# Altium PCB MolsonPCB.PcbDoc (part 4 of 9)
Units mil, origin at the board's own origin, x right, y up, seen from the top; angles counter-clockwise.
Board outline 8000 x 6000 mil, 14 copper layers (TopLayer (1 oz), InternalPlane1 (0.5 oz), InternalPlane2 (0.5 oz), MidLayer1 (0.5 oz), InternalPlane3 (0.5 oz), MidLayer2 (0.5 oz), InternalPlane4 (0.5 oz), InternalPlane5 (0.5 oz), MidLayer3 (0.5 oz), InternalPlane6 (0.5 oz), MidLayer4 (0.5 oz), InternalPlane7 (0.5 oz), InternalPlane8 (0.5 oz), BottomLayer (1 oz)), stack 86.2 mil thick; 657 components, 643 nets, 3094 pads, 1958 vias.
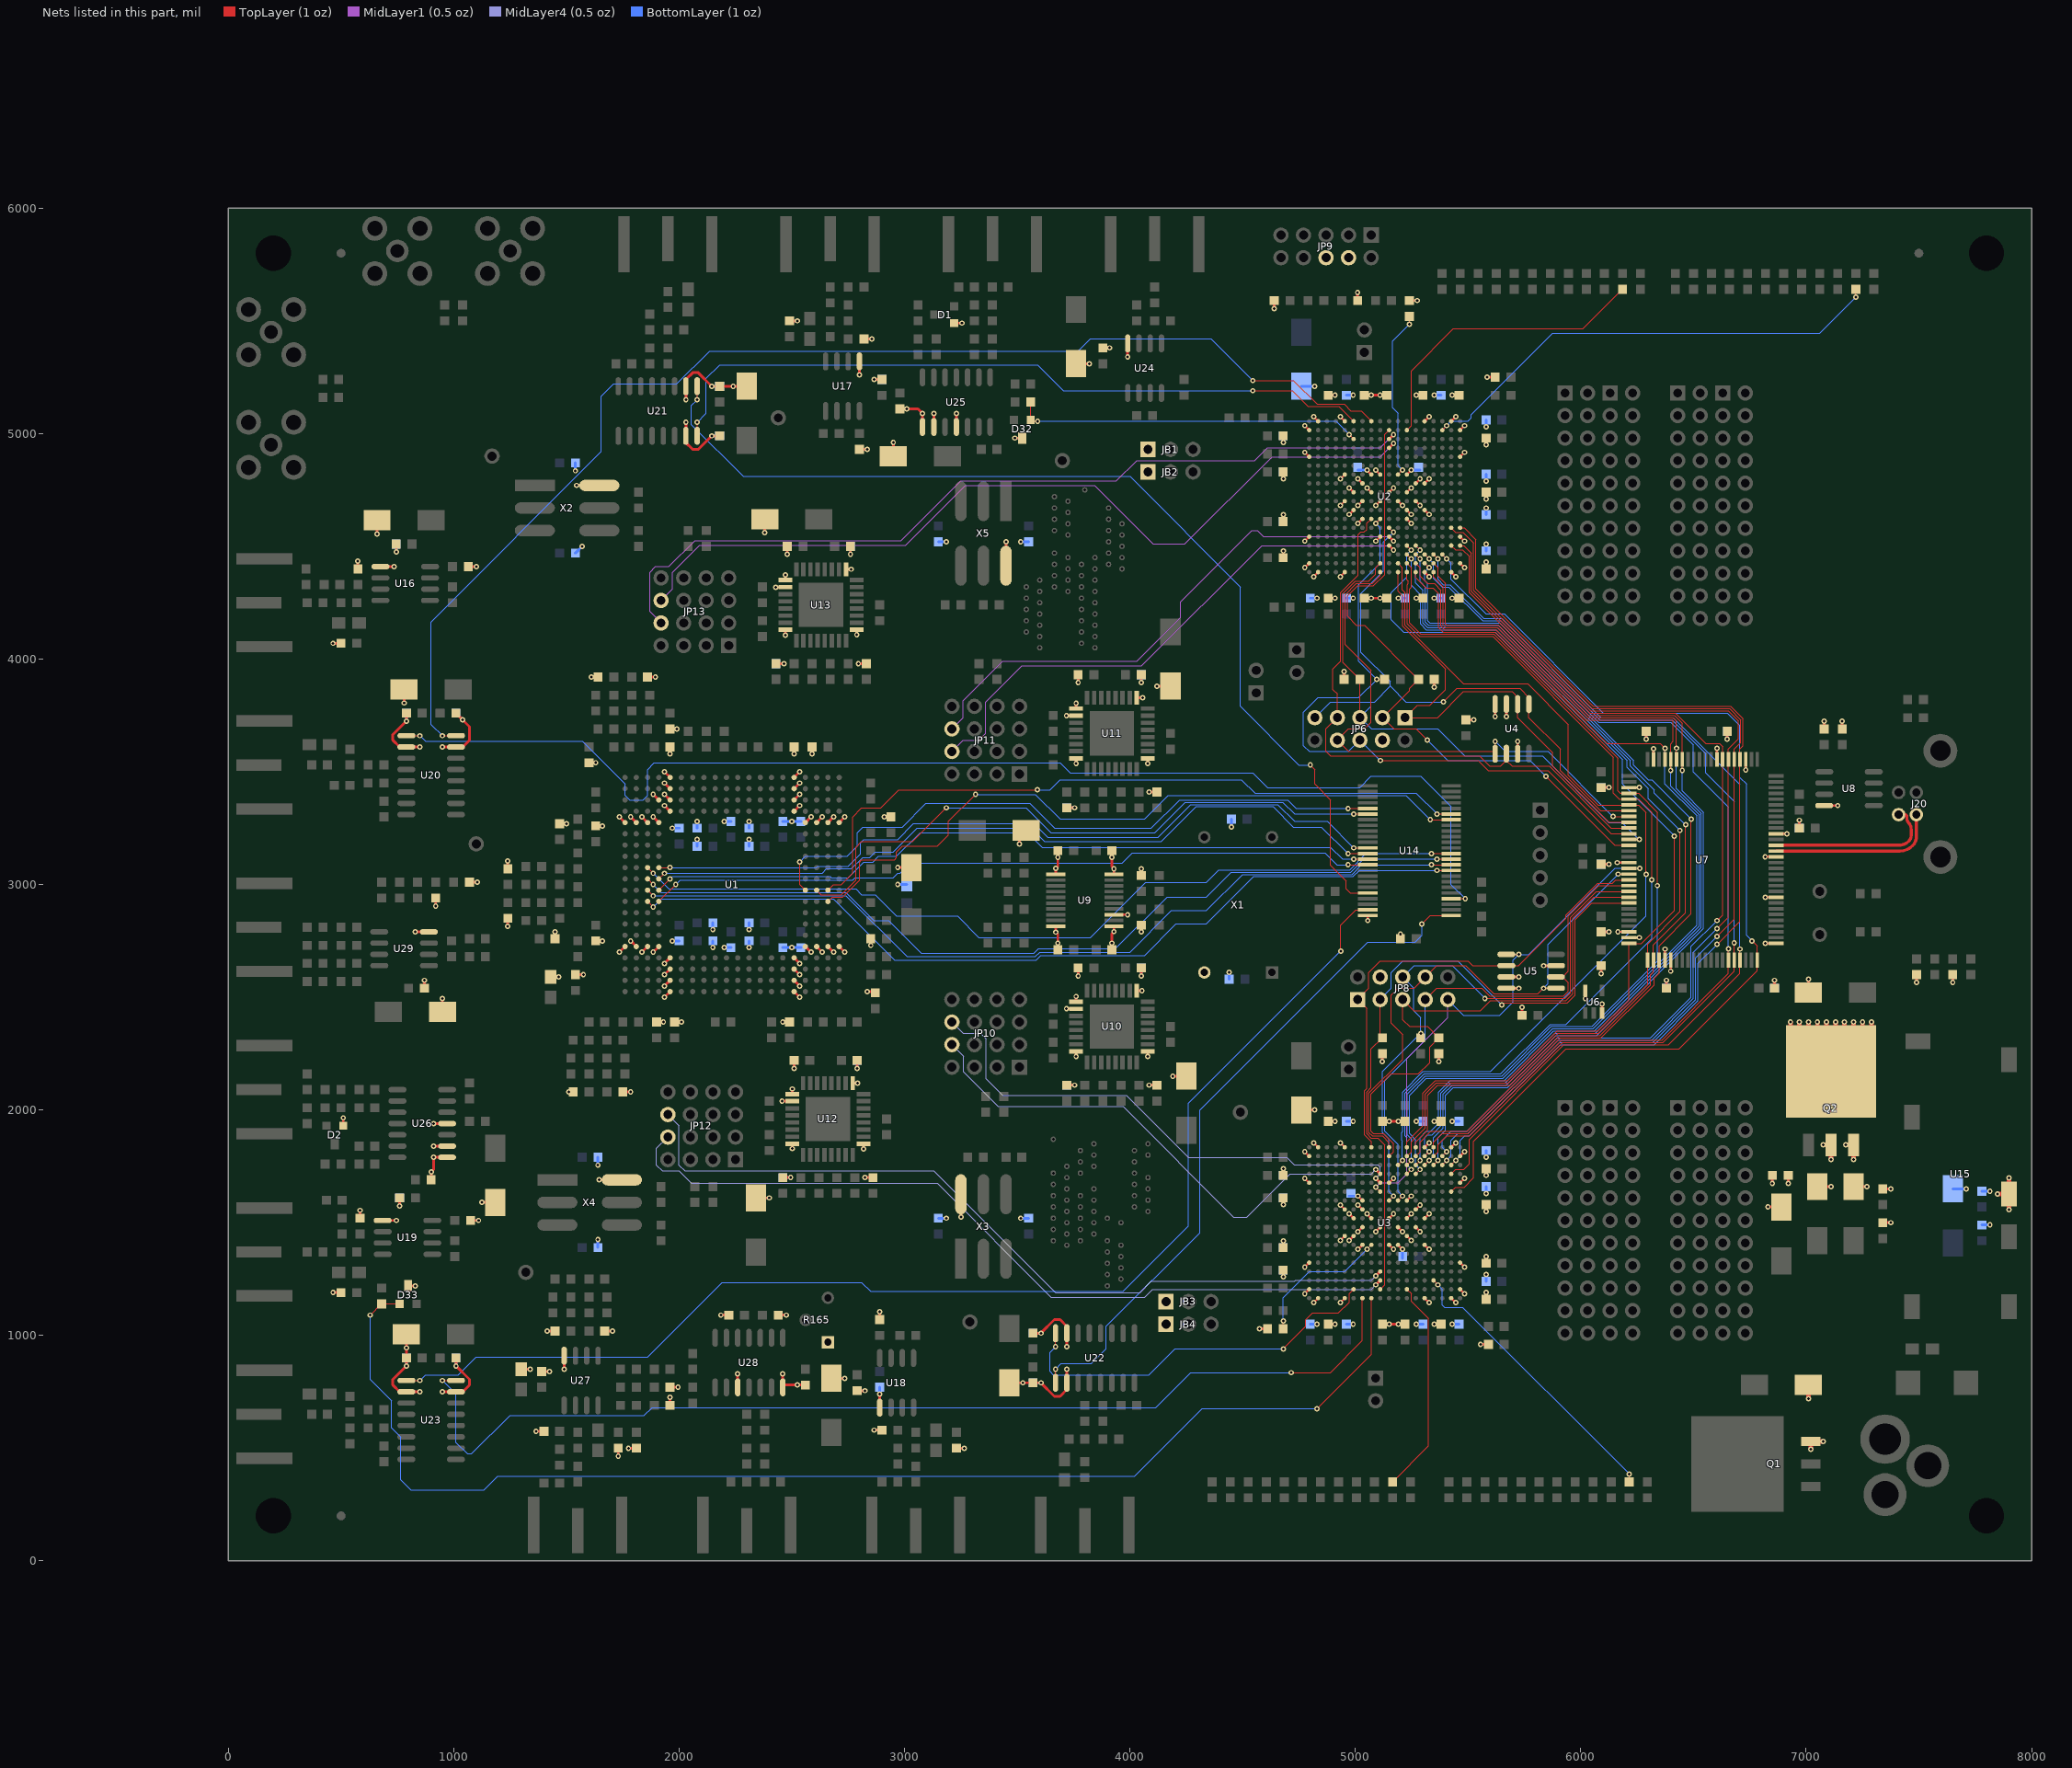
[diagram p16: the nets of this part, all layers, seen from the top]

## Via types
v1: diameter 24, hole 12, TopLayer (1 oz) to BottomLayer (1 oz), 1958 vias

## Nets (pads, with @x,y where several pads share a name; then routed paths per layer and width w, separated by ;. In a path a pad name is that pad's centre, name@x,y a point inside that pad or via, vN(x,y) a via of type N, cw(c..) or ccw(c..) an arc to the next point about the centre after c; other vN are vias at no path point)
+1.5V: C14.1 C15.1 C16.1 C17.1 C18.1 C19.1 C27.1 C28.1 C29.1 C30.1 C31.1 C32.1 C66.1 C178.1 C179.1 C180.1 C181.1 C182.1 C183.1 C192.1 C193.1 C194.1 C195.1 C196.1 C197.1 L10.1 Q2.2 Q2.4 U2.A2 U2.A17 U2.B1 U2.B18 U2.F8 U2.F10 U2.G9 U2.G11 U2.H10 U2.J9 U2.K10 U2.L9 U2.M8 U2.M10 U2.N9 U2.N11 U2.U1 U2.U18 U2.V2 U2.V17 U3.A2 U3.A17 U3.B1 U3.B18 U3.F8 U3.F10 U3.G9 U3.G11 U3.H10 U3.J9 U3.K10 U3.L9 U3.M8 U3.M10 U3.N9 U3.N11 U3.U1 U3.U18 U3.V2 U3.V17 | length 2278.6
  TopLayer (1 oz) w10: v1(4775.67,1185.04) U3.V17@4795.35,1204.73 ; v1(4775.67,1814.96) U3.V2@4795.35,1795.27 ; v1(4775.67,4405.04) U2.A2@4795.35,4424.73 ; v1(4775.67,5034.96) U2.A17@4795.35,5015.27 ; v1(4815.04,1145.67) U3.U18@4834.73,1165.35 ; v1(4815.04,1854.33) U3.U1@4834.73,1834.65 ; v1(4815.04,4365.67) U2.B1@4834.73,4385.35 ; v1(4815.04,5074.33) U2.B18@4834.73,5054.65 ; v1(4972.52,1421.26) U3.N11@4992.2,1440.94 ; v1(4972.52,1539.37) U3.N9@4992.2,1519.69 ; v1(4972.52,4641.26) U2.F8@4992.2,4660.94 ; v1(4972.52,4759.37) U2.F10@4992.2,4739.69 ; v1(5011.89,1460.63) U3.M10@5031.57,1480.31 ; v1(5011.89,1578.74) U3.M8@5031.57,1559.06 ; v1(5011.89,4680.63) U2.G9@5031.57,4700.31 ; v1(5011.89,4798.74) U2.G11@5031.57,4779.06 ; v1(5051.26,1539.37) U3.L9@5070.94,1519.69 ; v1(5051.26,4759.37) U2.H10@5070.94,4739.69 ; v1(5090.63,1460.63) U3.K10@5110.31,1480.31 ; v1(5090.63,4680.63) U2.J9@5110.31,4700.31 ; U3.J9@5149.69,1519.69 v1(5169.37,1539.37) ; U2.K10@5149.69,4739.69 v1(5169.37,4759.37) ; U3.H10@5189.06,1480.31 v1(5208.74,1460.63) ; U2.L9@5189.06,4700.31 v1(5208.74,4680.63) ; U3.G11@5228.43,1440.94 v1(5248.11,1421.26) ; U3.G9@5228.43,1519.69 v1(5248.11,1539.37) ; U2.M8@5228.43,4660.94 v1(5248.11,4641.26) ; U2.M10@5228.43,4739.69 v1(5248.11,4759.37) ; U3.F10@5267.8,1480.31 v1(5287.48,1460.63) ; U3.F8@5267.8,1559.06 v1(5287.48,1578.74) ; U2.N9@5267.8,4700.31 v1(5287.48,4680.63) ; U2.N11@5267.8,4779.06 v1(5287.48,4798.74) ; U3.B18@5425.27,1165.35 v1(5444.96,1145.67) ; U3.B1@5425.27,1834.65 v1(5444.96,1854.33) ; U2.U1@5425.27,4385.35 v1(5444.96,4365.67) ; U2.U18@5425.27,5054.65 v1(5444.96,5074.33) ; U3.A17@5464.65,1204.73 v1(5484.33,1185.04) ; U3.A2@5464.65,1795.27 v1(5484.33,1814.96) ; U2.V2@5464.65,4424.73 v1(5484.33,4405.04) ; U2.V17@5464.65,5015.27 v1(5484.33,5034.96)
  TopLayer (1 oz) w12: C195.1@4680,1390 v1(4680,1420) ; C193.1@4680,1710 v1(4680,1740) ; C14.1@4680,4450 v1(4680,4480) ; v1(4680,4800) C180.1@4680,4830 ; C197.1@4880,1050 v1(4910,1050) ; C30.1@4880,1950 v1(4910,1950) ; C182.1@4880,4270 v1(4910,4270) ; C178.1@4880,5170 v1(4910,5170) ; v1(5270,4270) C18.1@5300,4270 ; v1(5270,5170) C16.1@5300,5170 ; v1(5350,1050) C31.1@5380,1050 ; v1(5350,1950) C192.1@5380,1950 ; v1(5430,4270) C183.1@5460,4270 ; v1(5430,5170) C179.1@5460,5170 ; C196.1@5580,1160 v1(5580,1190) ; C32.1@5580,1320 v1(5580,1350) ; v1(5580,1550) C194.1@5580,1580 ; v1(5580,1710) C28.1@5580,1740 ; C19.1@5580,4400 v1(5580,4430) ; v1(5580,4710) C181.1@5580,4740 ; v1(5580,4950) C15.1@5580,4980 ; v1(6920,1675) L10.1@6920,1710 ; C66.1@7050,1660 v1(7110,1660)
  TopLayer (1 oz) w20: Q2.4@6930,2365 v1(6930,2390) ; Q2.4@6970,2365 v1(6970,2390) ; Q2.4@7010,2365 v1(7010,2390) ; Q2.4@7050,2365 v1(7050,2390) ; v1(7075,1845) Q2.2@7110,1845 v1(7110,1780) ; Q2.4@7090,2365 v1(7090,2390) ; Q2.4@7130,2365 v1(7130,2390) ; Q2.4@7170,2365 v1(7170,2390) ; Q2.4@7210,2365 v1(7210,2390) ; Q2.4@7250,2365 v1(7250,2390) ; Q2.4@7290,2365 v1(7290,2390)
  BottomLayer (1 oz) w12: C27.1@4680,1390 v1(4680,1420) ; C29.1@4680,1710 v1(4680,1740) ; v1(4680,4800) C17.1@4680,4830
+1.5VA: C146.1 C147.1 C148.1 C149.1 C150.1 C151.1 C152.1 C153.1 C154.1 L10.2 U2.J5 U2.J12 U3.J5 U3.J12 | length 606.4
  TopLayer (1 oz) w10: v1(5090.63,4523.15) U2.J5@5110.31,4542.84 ; v1(5090.63,4838.11) U2.J12@5110.31,4818.43 ; U3.J12@5149.69,1401.57 v1(5169.37,1381.89) ; U3.J5@5149.69,1677.16 v1(5169.37,1696.85)
  TopLayer (1 oz) w12: C149.1@5040,4270 C148.1@5140,4270 ; C147.1@5040,5170 C146.1@5140,5170 ; C150.1@5120,1050 C151.1@5220,1050 ; C152.1@5120,1950 C153.1@5220,1950 ; v1(6830,1570) C154.1@6890,1570 ; v1(6850,1675) L10.2@6850,1710
  other v1: 5150,1050 5190,1050 5150,1950 5190,1950 5070,4270 5110,4270 5070,5170 5110,5170
+3.3V: C1.1 C2.1 C3.1 C4.1 C5.1 C6.1 C7.1 C8.1 C9.1 C10.1 C11.1 C12.1 C13.1 C20.1 C21.1 C22.1 C23.1 C24.1 C25.1 C26.1 C33.1 C34.1 C35.1 C36.1 C37.1 C38.1 C39.1 C40.1 C45.1 C46.1 C47.1 C50.1 C51.1 C52.1 C55.1 C56.1 C57.1 C60.1 C61.1 C62.1 C65.1 C73.1 C85.1 C87.2 C101.1 C120.1 C126.1 C127.1 C128.1 C129.1 C130.1 C131.1 C132.1 C133.1 C138.1 C140.1 C141.1 C142.1 C143.1 C155.1 C156.1 C157.1 C159.1 C160.1 C161.1 C162.1 C163.1 C164.1 C165.1 C166.1 C167.1 C168.1 C169.1 C170.1 C171.1 C172.1 C173.1 C174.1 C175.1 C176.1 C177.1 C184.1 C185.1 C186.1 C187.1 C188.1 C189.1 C190.1 C191.1 C203.1 C204.1 C205.1 C206.1 C207.1 C208.1 C209.1 C210.1 C211.1 C212.1 C213.1 C214.1 C215.1 C216.1 C217.1 C218.1 C219.1 C220.1 C221.1 C222.1 C223.1 C224.1 C225.1 C226.1 C227.1 C228.1 C229.1 C230.1 C231.1 C232.1 C233.1 C234.1 C235.1 C236.1 C237.1 C238.1 C239.1 C240.1 C241.1 C242.1 C243.1 C244.1 C245.1 C246.1 C247.1 C248.1 C249.1 C250.1 C251.1 C252.1 C253.1 C254.1 C255.1 C256.1 C257.1 C258.1 C259.1 C260.1 C261.1 C262.1 C263.1 C264.1 C265.1 C266.1 C267.1 C268.1 C269.1 C270.1 C271.1 C272.1 C273.1 C274.1 C275.1 C276.1 C277.1 C278.1 C279.1 C280.1 C281.1 C282.1 C283.1 C284.1 C285.1 D32.3 D33.3 JB1.1 JB2.1 JB3.1 JB4.1 JP6.4 JP8.4 JP9.4 JP9.6 Q2.3 R3.2 R4.2 R5.2 R9.2 R10.2 R11.2 R13.2 R14.2 R16.2 R17.2 R18.2 R79.2 R80.2 R87.2 R88.2 R95.2 R96.2 R108.2 R109.2 R113.2 R114.2 R115.2 R116.2 R193.1 R196.1 R197.1 R198.2 R199.2 U1.A5 U1.A16 U1.B5 U1.B16 U1.C5 U1.C16 U1.D5 U1.D16 U1.D18 U1.E1 U1.E2 U1.E3 U1.E4 U1.E17 U1.E18 U1.E19 U1.E20 U1.T1 U1.T2 U1.T3 U1.T4 U1.T17 U1.T18 U1.T19 U1.T20 U1.U5 U1.U16 U1.V5 U1.V16 U1.W5 U1.W16 U1.Y5 U1.Y16 U2.A5 U2.A14 U2.E1 U2.E9 U2.E12 U2.E18 U2.G7 U2.H12 U2.M7 U2.M12 U2.P1 U2.P8 U2.P11 U2.P18 U2.V5 U2.V14 U3.A5 U3.A14 U3.E1 U3.E9 U3.E12 U3.E18 U3.G7 U3.H12 U3.M7 U3.M12 U3.P1 U3.P8 U3.P11 U3.P18 U3.V5 U3.V14 U4.3 U4.7 U4.8 U5.3 U5.7 U5.8 U6.3 U6.5 U7.1 U7.9 U7.16 U7.20 U7.33 U7.38 U7.49 U7.53 U7.66 U7.78 U7.79 U7.84 U7.85 U8.8 U9.1 U9.3 U9.10 U9.11 U9.20 U10.1 U10.9 U10.17 U10.18 U10.24 U11.1 U11.9 U11.17 U11.18 U11.24 U12.1 U12.9 U12.17 U12.18 U12.24 U13.1 U13.9 U13.17 U13.18 U13.24 U14.48 U15.P2 U16.5 U17.5 U18.5 U19.5 U20.2 U20.15 U21.2 U21.15 U22.2 U22.15 U23.2 U23.15 U24.8 X1.14 X2.6 X3.6 X4.6 X5.6 | length 14243.6
  TopLayer (1 oz) w10: v1(3928.94,2791.06) U9.1@3928.94,2814.84 ; U9.3@3928.94,2866.02 v1(3990,2866.02) ; U9.10@3928.94,3045.16 v1(3928.94,3070) ; v1(4775.67,1303.15) U3.V14@4795.35,1322.84 ; v1(4775.67,1696.85) U3.V5@4795.35,1677.16 ; v1(4775.67,4523.15) U2.A5@4795.35,4542.84 ; v1(4775.67,4916.85) U2.A14@4795.35,4897.16 ; v1(4933.15,1145.67) U3.P18@4952.84,1165.35 ; v1(4933.15,1421.26) U3.P11@4952.84,1440.94 ; v1(4933.15,1578.74) U3.P8@4952.84,1559.06 ; v1(4933.15,1854.33) U3.P1@4952.84,1834.65 ; v1(4933.15,4365.67) U2.E1@4952.84,4385.35 ; v1(4933.15,4680.63) U2.E9@4952.84,4700.31 ; v1(4933.15,4798.74) U2.E12@4952.84,4818.43 ; v1(4933.15,5074.33) U2.E18@4952.84,5054.65 ; v1(5011.89,1381.89) U3.M12@5031.57,1401.57 ; v1(5011.89,1618.11) U3.M7@5031.57,1598.43 ; v1(5011.89,4601.89) U2.G7@5031.57,4621.57 ; v1(5051.26,4838.11) U2.H12@5070.94,4818.43 ; v1(5054.96,2840.04) U14.48@5054.96,2862.5 ; U3.H12@5189.06,1401.57 v1(5208.74,1381.89) ; U3.G7@5228.43,1598.43 v1(5248.11,1618.11) ; U2.M7@5228.43,4621.57 v1(5248.11,4601.89) ; U2.M12@5228.43,4818.43 v1(5248.11,4838.11) ; U3.E18@5307.16,1165.35 v1(5326.85,1145.67) ; U3.E12@5307.16,1401.57 v1(5326.85,1381.89) ; U3.E9@5307.16,1519.69 v1(5326.85,1539.37) ; U3.E1@5307.16,1834.65 v1(5326.85,1854.33) ; U2.P1@5307.16,4385.35 v1(5326.85,4365.67) ; U2.P8@5307.16,4660.94 v1(5326.85,4641.26) ; U2.P11@5307.16,4779.06 v1(5326.85,4798.74) ; U2.P18@5307.16,5054.65 v1(5326.85,5074.33) ; U3.A14@5464.65,1322.84 v1(5484.33,1303.15) ; U3.A5@5464.65,1677.16 v1(5484.33,1696.85) ; U2.V5@5464.65,4542.84 v1(5484.33,4523.15) ; U2.V14@5464.65,4897.16 v1(5484.33,4916.85) ; v1(6162.2,3097.2) U7.66@6213.03,3097.2 ; v1(6164.88,2790.12) U7.78@6213.03,2790.12 ; U7.79@6213.03,2764.53 v1(6259.53,2764.53) ; U7.53@6213.03,3429.88 v1(6259.88,3429.88) ; U7.49@6322.48,3555.08 v1(6322.48,3602.52) ; U7.84@6373.66,2664.92 v1(6373.66,2713.66) ; v1(6399.25,2615.75) U7.85@6399.25,2664.92 ; U7.38@6603.98,3555.08 v1(6603.98,3603.98) ; v1(6731.93,3508.07) U7.33@6731.93,3555.08 ; v1(6817.8,3122.8) U7.16@6866.97,3122.8 ; v1(6818.66,2943.66) U7.9@6866.97,2943.66 ; v1(6818.94,2738.94) U7.1@6866.97,2738.94 ; U7.20@6866.97,3225.16 v1(6914.84,3225.16)
  TopLayer (1 oz) w12: v1(465,1190) R108.2@500,1190 ; v1(465,4070) R79.2@500,4070 ; R80.2@575,4400 v1(575,4435) ; R109.2@585,1520 v1(585,1555) ; v1(660,4555) C203.1@660,4615 ; U16.5@675,4410 v1(735,4410) ; U19.5@685,1510 v1(745,1510) ; v1(745,4475) C73.1@745,4510 ; U23.2@760,750 730,780 730,805 v1(790,865) C210.1@790,1005 ; v1(760,1575) C120.1@760,1610 ; U20.2@760,3610 730,3640 730,3665 v1(790,3725) C127.1@790,3760 ; v1(780,3805) C207.1@780,3865 ; U23.2@790,750 v1(850,750) ; U20.2@790,3610 v1(850,3610) ; D33.3@798,1220 v1(830,1220) ; v1(950,750) U23.15@1010,750 ; v1(950,3610) U20.15@1010,3610 ; C133.1@1010,900 v1(1010,865) 1070,805 1070,780 U23.15@1040,750 ; C126.1@1010,3760 1070,3700 1070,3640 U20.15@1040,3610 ; R113.2@1065,4410 v1(1100,4410) ; R116.2@1075,1510 v1(1110,1510) ; v1(1125,1590) C206.1@1185,1590 ; C227.1@1430,2590 v1(1465,2590) ; C215.1@1450,2760 v1(1450,2790) ; C214.1@1470,3270 v1(1500,3270) ; C216.1@1540,2600 v1(1575,2600) ; v1(1545,4770) X2.6@1646,4770 ; C211.1@1600,3540 v1(1630,3540) ; C7.1@1630,2750 v1(1660,2750) ; C8.1@1630,3260 v1(1660,3260) ; v1(1645,1690) X4.6@1746,1690 ; v1(1735,2700) U1.A5@1760,2725 ; v1(1735,3300) U1.A16@1760,3275 ; v1(1785,2750) U1.B5@1810,2725 ; v1(1785,3300) U1.B16@1810,3275 ; v1(1835,2700) U1.C5@1860,2725 ; v1(1835,3300) U1.C16@1860,3275 ; v1(1885,2700) U1.D5@1910,2725 ; v1(1885,3300) U1.D16@1910,3275 ; v1(1885,3400) U1.D18@1910,3375 ; C217.1@1900,2390 v1(1930,2390) ; v1(1935,2500) U1.E1@1960,2525 ; v1(1935,2550) U1.E2@1960,2575 ; v1(1935,2600) U1.E3@1960,2625 ; v1(1935,2650) U1.E4@1960,2675 ; v1(1935,3350) U1.E17@1960,3325 ; v1(1935,3400) U1.E18@1960,3375 ; v1(1935,3450) U1.E19@1960,3425 ; v1(1935,3500) U1.E20@1960,3475 ; v1(1960,3580) C1.1@1960,3610 ; C212.1@1960,3690 v1(1990,3690) ; C5.1@1980,2390 v1(2010,2390) ; U21.15@2030,4960 2060,4930 2085,4930 v1(2145,4990) C128.1@2180,4990 ; U21.15@2030,4990 v1(2030,5050) ; v1(2030,5150) U21.2@2030,5210 ; U21.2@2030,5240 2060,5270 2085,5270 v1(2145,5210) C208.1@2300,5210 ; C243.1@2340,1610 v1(2400,1610) ; v1(2380,4560) C244.1@2380,4620 ; v1(2428.74,4318.74) U13.18@2471.54,4318.74 ; C61.1@2430,3980 v1(2465,3980) ; v1(2456.26,2038.74) U12.18@2501.54,2038.74 ; C55.1@2460,1700 v1(2495,1700) ; v1(2460,2390) C6.1@2490,2390 ; v1(2471.54,4106.54) U13.24@2471.54,4129.76 ; U13.17@2471.54,4350.24 v1(2471.54,4373.46) ; v1(2480,4465) C239.1@2480,4500 ; R87.2@2490,5500 v1(2525,5500) ; v1(2501.54,1828.46) U12.24@2501.54,1849.76 ; U12.17@2501.54,2070.24 v1(2501.54,2093.46) ; v1(2510,2185) C236.1@2510,2220 ; U1.T1@2510,2525 v1(2535,2500) ; U1.T2@2510,2575 v1(2535,2550) ; U1.T3@2510,2625 v1(2535,2600) ; U1.T4@2510,2675 v1(2535,2650) ; U1.T17@2510,3325 v1(2535,3350) ; U1.T18@2510,3375 v1(2535,3400) ; U1.T19@2510,3425 v1(2535,3450) ; U1.T20@2510,3475 v1(2535,3500) ; v1(2510,3580) C2.1@2510,3610 ; U1.U5@2560,2725 v1(2585,2700) ; U1.U16@2560,3275 v1(2585,3300) ; v1(2590,3580) C213.1@2590,3610 ; U1.V5@2610,2725 v1(2635,2700) ; U1.V16@2610,3275 v1(2635,3300) ; U1.W5@2660,2725 v1(2685,2700) ; U1.W16@2660,3275 v1(2685,3300) ; C205.1@2675,810 v1(2735,810) ; U1.Y5@2710,2725 v1(2735,2700) ; U1.Y16@2710,3275 v1(2735,3300) ; U13.9@2740.24,4398.46 v1(2763.46,4398.46) ; v1(2760,4465) C62.1@2760,4500 ; U12.9@2770.24,2118.46 v1(2791.54,2118.46) ; v1(2788.46,4108.46) U13.1@2788.46,4129.76 ; C101.1@2790,755 v1(2825,755) ; v1(2790,2185) C57.1@2790,2220 ; v1(2795,3980) C60.1@2830,3980 ; R114.2@2800,4930 v1(2835,4930) ; v1(2800,5260) U17.5@2800,5320 ; v1(2818.46,1826.54) U12.1@2818.46,1849.76 ; R88.2@2820,5420 v1(2855,5420) ; v1(2825,1700) C56.1@2860,1700 ; v1(2835,2525) C218.1@2870,2525 ; v1(2850,2730) C4.1@2850,2760 ; v1(2865,580) R96.2@2900,580 ; v1(2865,5240) C85.1@2900,5240 ; U18.5@2890,680 v1(2890,740) ; R115.2@2890,1070 v1(2890,1105) ; v1(2910,3300) C3.1@2940,3300 ; C204.1@2950,4900 v1(2950,4960) ; v1(2970,3075) C167.1@3030,3075 ; R95.2@3230,500 v1(3265,500) ; v1(3250,1525) X3.6@3250,1626 ; X5.6@3450,4414 v1(3450,4520) ; C209.1@3465,790 v1(3605,790) 3665,730 3690,730 U22.2@3720,760 ; v1(3490,4980) D32.3@3522,4980 ; v1(3510,3180) C245.1@3510,3240 ; C131.1@3570,1010 v1(3605,1010) 3665,1070 3690,1070 U22.15@3720,1040 ; U9.20@3671.06,2814.84 v1(3671.06,2788.94) 3680,2780 C141.1@3680,2710 ; U9.11@3671.06,3045.16 v1(3671.06,3071.06) 3680,3080 C140.1@3680,3150 ; v1(3718.74,2448.74) U10.18@3761.54,2448.74 ; v1(3718.74,3748.74) U11.18@3761.54,3748.74 ; U22.2@3720,790 v1(3720,850) ; v1(3720,950) U22.15@3720,1010 ; C46.1@3720,2110 v1(3755,2110) ; C51.1@3720,3340 v1(3755,3340) ; C138.1@3760,5310 v1(3820,5310) ; v1(3761.54,2236.54) U10.24@3761.54,2259.76 ; U10.17@3761.54,2480.24 v1(3761.54,2503.46) ; v1(3761.54,3536.54) U11.24@3761.54,3559.76 ; U11.17@3761.54,3780.24 v1(3761.54,3803.46) ; v1(3770,2595) C230.1@3770,2630 ; v1(3770,3895) C233.1@3770,3930 ; C87.2@3880,5380 v1(3910,5380) ; C247.1@3920,2710 3920,2782.13 v1(3928.94,2791.06) ; C246.1@3920,3150 3920,3078.94 v1(3928.94,3070) ; v1(3990,5340) U24.8@3990,5400 ; U10.9@4030.24,2528.46 v1(4053.46,2528.46) ; U11.9@4030.24,3828.46 v1(4056.54,3828.46) ; v1(4050,2595) C45.1@4050,2630 ; v1(4050,2790) R198.2@4050,2820 ; R199.2@4050,3040 v1(4050,3070) ; v1(4050,3895) C50.1@4050,3930 ; v1(4078.46,2236.54) U10.1@4078.46,2259.76 ; v1(4078.46,3536.54) U11.1@4078.46,3559.76 ; v1(4085,2110) C47.1@4120,2110 ; v1(4085,3410) C52.1@4120,3410 ; v1(4120,3880) C242.1@4180,3880 ; v1(4190,2150) C241.1@4250,2150 ; v1(4575,1030) R10.2@4610,1030 ; v1(4640,5555) R14.2@4640,5590 ; v1(4680,1260) C33.1@4680,1290 ; v1(4680,1580) C34.1@4680,1610 ; C20.1@4680,4610 v1(4680,4640) ; v1(4680,4960) C21.1@4680,4990 ; C251.1@4760,2000 v1(4820,2000) ; R5.2@4950,3910 v1(4950,3945) ; R13.2@5010,5590 v1(5010,5625) ; v1(5120,2215) R9.2@5120,2250 ; R4.2@5240,5590 v1(5275,5590) ; v1(5350,3875) R3.2@5350,3910 ; v1(5370,2215) R11.2@5370,2250 ; C9.1@5490,3730 v1(5525,3730) ; v1(5555,960) R197.1@5590,960 ; v1(5585,5250) R196.1@5620,5250 ; v1(5620,3745) U4.8@5620,3800 ; U5.8@5670,2540 v1(5725,2540) ; U5.7@5670,2590 v1(5725,2590) ; v1(5670,3745) U4.7@5670,3800 ; U4.3@5720,3580 v1(5720,3635) ; C22.1@5740,2420 v1(5740,2455) ; v1(5835,2640) U5.3@5890,2640 ; v1(6020,2495) U6.5@6020,2530 ; v1(6090,2605) R16.2@6090,2640 ; C168.1@6090,2790 v1(6125,2790) ; C40.1@6090,3090 v1(6125,3090) ; C36.1@6090,3430 v1(6125,3430) ; U6.3@6095,2430 v1(6095,2470) ; v1(6290,3645) C169.1@6290,3680 ; C35.1@6380,2540 v1(6380,2575) ; v1(6650,3645) C37.1@6650,3680 ; C38.1@6860,2540 v1(6860,2575) ; C39.1@6970,3250 v1(6970,3285) ; C260.1@7010,2520 v1(7010,2580) ; U8.8@7080,3350 v1(7140,3350) ; R18.2@7080,3690 v1(7080,3725) ; R17.2@7160,3690 v1(7160,3725) ; C262.1@7210,1660 v1(7270,1660) ; C65.1@7340,1500 v1(7375,1500) ; C261.1@7340,1650 v1(7375,1650) ; v1(7650,2565) R193.1@7650,2600 v1(7650,2565)
  TopLayer (1 oz) w20: v1(7175,1845) Q2.3@7210,1845 v1(7210,1780) ; v1(7849.41,1627.83) U15.P2@7899.72,1627.83 ; v1(7899.72,1558.31) v1(7899.72,1698.15)
  BottomLayer (1 oz) w12: v1(745,4475) C266.1@745,4510 ; v1(760,1575) C269.1@760,1610 ; v1(790,865) C276.1@790,900 ; v1(790,3725) C271.1@790,3760 ; v1(1010,865) C277.1@1010,900 ; C270.1@1010,3760 v1(1040,3730) ; C282.1@1540,4470 v1(1570,4500) ; v1(1540,4835) C278.1@1540,4870 ; C285.1@1640,1390 v1(1640,1425) ; v1(1640,1755) C281.1@1640,1790 ; v1(1970,2750) C163.1@2000,2750 ; v1(1970,3250) C159.1@2000,3250 ; C222.1@2080,3170 v1(2080,3200) ; C160.1@2080,3250 v1(2080,3280) ; v1(2145,4990) C272.1@2180,4990 ; v1(2145,5210) C273.1@2180,5210 ; v1(2150,2720) C164.1@2150,2750 ; v1(2150,2800) C226.1@2150,2830 ; v1(2200,2720) C225.1@2230,2720 ; v1(2200,3280) C221.1@2230,3280 ; v1(2310,2720) C165.1@2310,2750 ; v1(2310,2800) C224.1@2310,2830 ; C220.1@2310,3170 v1(2310,3200) ; C161.1@2310,3250 v1(2310,3280) ; C240.1@2430,3980 v1(2465,3980) ; C237.1@2460,1700 v1(2495,1700) ; C166.1@2460,2720 C223.1@2540,2720 ; C162.1@2460,3280 C219.1@2540,3280 ; v1(2760,4465) C238.1@2760,4500 ; v1(2790,2185) C235.1@2790,2220 ; v1(2865,5240) C267.1@2900,5240 ; v1(2890,740) C268.1@2890,770 ; v1(2970,3000) C228.1@3010,3000 ; C283.1@3150,1520 v1(3185,1520) ; C280.1@3150,4520 v1(3185,4520) ; v1(3515,1520) C279.1@3550,1520 ; v1(3515,4520) C284.1@3550,4520 ; C274.1@3570,790 v1(3605,790) ; C275.1@3570,1010 v1(3605,1010) ; C231.1@3720,2110 v1(3755,2110) ; C234.1@3720,3340 v1(3755,3340) ; v1(4050,2595) C229.1@4050,2630 ; v1(4050,3895) C232.1@4050,3930 ; C249.1@4440,2580 v1(4440,2610) ; v1(4450,3255) C248.1@4450,3290 ; v1(4680,1260) C188.1@4680,1290 ; v1(4680,1580) C186.1@4680,1610 ; C174.1@4680,4610 v1(4680,4640) ; v1(4680,4960) C172.1@4680,4990 ; C250.1@4760,5210 v1(4820,5210) ; C190.1@4800,1050 v1(4830,1050) ; C155.1@4800,4270 v1(4830,4270) ; C157.1@4960,1050 v1(4990,1050) ; C184.1@4960,1950 v1(4990,1950) ; C176.1@4960,4270 v1(4990,4270) ; C170.1@4960,5170 v1(4990,5170) ; C23.1@4972.52,1618.11 v1(5011.89,1618.11) ; C10.1@5011.89,4838.11 v1(5051.26,4838.11) ; v1(5190,4270) C143.1@5220,4270 ; C26.1@5208.74,1342.52 v1(5208.74,1381.89) ; v1(5248.11,4838.11) C11.1@5287.48,4838.11 ; v1(5270,1050) C156.1@5300,1050 ; v1(5270,1950) C24.1@5300,1950 ; v1(5350,4270) C177.1@5380,4270 ; v1(5350,5170) C171.1@5380,5170 ; v1(5430,1050) C191.1@5460,1050 ; v1(5430,1950) C185.1@5460,1950 ; C189.1@5580,1240 v1(5580,1270) ; v1(5580,1630) C25.1@5580,1660 ; v1(5580,1790) C187.1@5580,1820 ; C13.1@5580,4480 v1(5580,4510) ; C175.1@5580,4640 v1(5580,4670) ; v1(5580,4790) C12.1@5580,4820 ; v1(5580,5030) C173.1@5580,5060 ; C257.1@6090,2790 v1(6125,2790) ; C256.1@6090,3090 v1(6125,3090) ; C254.1@6090,3430 v1(6125,3430) ; v1(6290,3645) C253.1@6290,3680 ; C259.1@6380,2540 v1(6380,2575) ; v1(6650,3645) C252.1@6650,3680 ; C258.1@6860,2540 v1(6860,2575) ; C255.1@6970,3250 v1(6970,3285) ; C265.1@7650,1650 v1(7710,1650) ; C263.1@7780,1490 v1(7815,1490) ; C264.1@7780,1640 v1(7815,1640)
  other v1: 3525,790 790,945 2500,2720 3680,2740 3920,2740 5200,2780 3680,3120 3920,3120 2500,3280 2240,5210
+5V: C64.1 C88.1 C89.1 C94.1 C95.1 C107.2 C118.1 C125.2 C139.1 C144.1 C145.1 D1.1 D2.1 Q1.3 R93.2 R99.2 R100.2 R117.2 R126.2 R127.1 R128.2 R129.1 R147.2 R148.2 R149.2 R150.2 R155.2 R165.1 R194.1 R219.2 U25.1 U25.2 U25.4 U26.1 U26.2 U26.4 U27.8 U28.3 U28.7 U29.8 | length 1893.8
  TopLayer (1 oz) w12: D2.1@510,1930 v1(510,1965) ; v1(830,2790) U29.8@890,2790 ; C125.2@870,2540 v1(870,2575) ; C107.2@900,1690 v1(900,1725) 910.14,1735.14 v1(910.14,1789.86) U26.1@970.32,1789.86 ; v1(910.14,1839.86) U26.2@970.32,1839.86 ; v1(910.14,1939.86) U26.4@970.32,1939.86 ; v1(920,2905) R117.2@920,2940 ; C139.1@950,2435 v1(950,2495) ; C118.1@1070,3010 v1(1105,3010) ; v1(1240,2815) R128.2@1240,2850 ; R129.1@1240,3070 v1(1240,3105) ; C95.1@1300,850 v1(1340,850) ; v1(1365,575) R219.2@1400,575 ; C94.1@1390,840 v1(1425,840) ; v1(1415,1020) R148.2@1450,1020 ; v1(1490,850) U27.8@1490,910 ; v1(1610,3920) R127.1@1640,3920 ; R147.2@1670,1020 v1(1705,1020) ; v1(1730,465) R93.2@1730,500 ; R150.2@1750,2080 v1(1785,2080) ; v1(1775,500) C89.1@1810,500 ; R126.2@1860,3920 v1(1895,3920) ; C88.1@1960,690 v1(1960,725) ; R155.2@1960,770 v1(1995,770) ; v1(2185,1090) R99.2@2220,1090 ; U28.3@2259.86,769.68 v1(2259.86,829.86) ; R100.2@2440,1090 v1(2475,1090) ; U28.7@2459.86,769.68 v1(2459.86,829.86) ; U28.7@2459.86,780 C145.1@2560,780 ; C144.1@2980,5110 3059.72,5110 v1(3079.86,5089.86) U25.1@3079.86,5029.68 ; U25.2@3129.86,5029.68 v1(3129.86,5089.86) ; D1.1@3220,5490 v1(3255,5490) ; U25.4@3229.86,5029.68 v1(3229.86,5089.86) ; v1(7490,2565) R194.1@7490,2600
  TopLayer (1 oz) w20: v1(7010,720) C64.1@7010,780 ; v1(7020,495) Q1.3@7020,530 v1(7075,530)
  other v1: 2525,780 1510,2080 3010,5110
ADDR0: U1.U10 U14.29 | length 2911
  TopLayer (1 oz) w5: v1(2535,3100) 2535,3000 U1.U10@2560,2975 ; v1(4967.5,3337.5) U14.29@5054.96,3337.5
  BottomLayer (1 oz) w5: v1(2535,3100) 2560,3125 2745,3125 2790,3170 2790,3230 2815,3255 2990,3255 3095,3360 3555,3360 3665,3250 4095,3250 4220,3375 4700,3375 4737.5,3337.5 v1(4967.5,3337.5)
ADDR1: U1.W10 U14.19 | length 3177.6
  TopLayer (1 oz) w5: U1.W10@2660,2975 2685,3000 2720,3000 2770,3050 2770,3300 2810,3340 2895,3340 2975,3420 v1(3590,3420) ; v1(5362.5,3312.5) U14.19@5425.04,3312.5
  BottomLayer (1 oz) w5: v1(3590,3420) 3645,3420 3690,3465 4495,3465 4555,3405 5270,3405 v1(5362.5,3312.5)
ADDR2: U1.V10 U14.30 | length 2820.9
  TopLayer (1 oz) w5: U1.V10@2610,2975 2630,2955 2720,2955 2785,3020 2785,3165 2810,3190 3035,3190 v1(3185,3340) ; v1(4992.5,3312.5) U14.30@5054.96,3312.5
  BottomLayer (1 oz) w5: v1(3185,3340) 3540,3340 3650,3230 4110,3230 4245,3365 4677.5,3365 4730,3312.5 v1(4992.5,3312.5)
ADDR3: U1.W9 U14.18 | length 3192
  TopLayer (1 oz) w5: U1.W9@2660,2925 2680,2945 2725,2945 2800,3020 2800,3100 2810,3110 2955,3110 2965,3120 2965,3145 2990,3170 3145,3170 3195,3220 3195,3280 v1(3315,3400) ; v1(5332.5,3287.5) U14.18@5425.04,3287.5
  BottomLayer (1 oz) w5: v1(3315,3400) 3580,3400 3690,3290 4065,3290 4170,3395 5225,3395 v1(5332.5,3287.5)
C\D\/MUTEA: U2.H18 U20.16 | length 5571.3
  TopLayer (1 oz) w5: v1(950,3660) U20.16@1010,3660 ; v1(4545,5235) 4725,5235 4830,5130 4950,5130 4980,5100 5025.59,5100 U2.H18@5070.94,5054.65
  BottomLayer (1 oz) w5: v1(950,3660) 900,3710 900,4165 1655,4920 1655,5165 1710,5220 1990,5220 2135,5365 3770,5365 3825,5420 4360,5420 v1(4545,5235)
C\D\/MUTEB: U2.F18 U21.16 | length 3272.3
  TopLayer (1 oz) w5: U21.16@2080,4990 v1(2080,5050) ; v1(4545,5190) 4720,5190 4790,5120 4926.85,5120 U2.F18@4992.2,5054.65
  BottomLayer (1 oz) w5: v1(2080,5050) 2120,5090 2120,5245 2180,5305 3590,5305 3705,5190 v1(4545,5190)
C\D\/MUTEC: U3.N17 U22.16 | length 1730.6
  TopLayer (1 oz) w5: v1(3670,950) U22.16@3670,1010 ; v1(4680,940) 4780,1040 4780,1070 4810,1100 4925,1100 4972.52,1147.52 4972.52,1185.04 U3.N17@4992.2,1204.73
  BottomLayer (1 oz) w5: v1(3670,950) 3645,925 3645,840 3660,825 4085,825 4200,940 v1(4680,940)
C\D\/MUTED: U3.M18 U23.16 | length 4798.7
  TopLayer (1 oz) w5: v1(950,800) U23.16@1010,800 ; v1(4715,835) 4890,835 5031.57,976.57 U3.M18@5031.57,1165.35
  BottomLayer (1 oz) w5: v1(950,800) 1010,740 1010,525 1060,475 1080,475 1250,645 1845,645 1880,680 4115,680 4270,835 v1(4715,835)
CD/M\U\T\E\B2: D32.1 R217.2 U2.F16 | length 1544.5
  TopLayer (1 oz) w5: D32.1@3560,5060 R217.2@3560,5140 ; D32.1@3560.35,5054.65 v1(3590.35,5054.65) ; v1(4972.52,4995.59) U2.F16@4992.2,4975.9
  BottomLayer (1 oz) w5: v1(3590.35,5054.65) 4913.46,5054.65 v1(4972.52,4995.59)
CD/M\U\T\E\D2: D33.1 R218.2 U3.L18 | length 5759.5
  TopLayer (1 oz) w5: v1(630,1090) R218.2@680,1140 D33.1@760,1140 ; v1(4830,675) 5070.94,915.95 U3.L18@5070.94,1165.35
  BottomLayer (1 oz) w5: v1(630,1090) 630,805 725,710 725,590 765,550 765,360 810,315 1135,315 1195,375 4020,375 4320,675 v1(4830,675)
CDA_04: R169.1 U2.M17 | length 1357.8
  TopLayer (1 oz) w5: U2.M17@5228.43,5015.27 5248.11,5034.96 5248.11,5278.11 5435,5465 6010,5465 R169.1@6185,5640
CDB_04: R175.1 U2.T17 | length 2122.2
  TopLayer (1 oz) w5: U2.T17@5385.9,5015.27 v1(5405.59,5034.96) ; v1(7220,5605) R175.1@7220,5640
  BottomLayer (1 oz) w5: v1(5405.59,5034.96) 5425.28,5054.65 5499.65,5054.65 5515,5070 5515,5085 5875,5445 7060,5445 v1(7220,5605)
CDC_05: R181.1 U3.G17 | length 961
  TopLayer (1 oz) w5: R181.1@5165,350 5325,510 5325,1075 5248.11,1151.89 5248.11,1185.04 U3.G17@5228.43,1204.73
CDD_05: R187.1 U3.D16 | length 1300.7
  TopLayer (1 oz) w5: U3.D16@5346.53,1244.1 v1(5366.22,1224.41) ; R187.1@6215,350 v1(6215,385)
  BottomLayer (1 oz) w5: v1(5366.22,1224.41) 5385.91,1204.72 5385.91,1134.09 5395,1125 5475,1125 v1(6215,385)
CLIA: U14.4 U20.1 | length 5536.1
  TopLayer (1 oz) w5: U20.1@790,3660 v1(850,3660) ; U14.4@5425.04,2937.5 v1(5487.5,2937.5)
  BottomLayer (1 oz) w5: v1(850,3660) 875,3635 1570,3635 1760,3445 1760,3395 1780,3375 1840,3375 1860,3395 1860,3510 1890,3540 3690,3540 3735,3495 4545,3495 4610,3430 5020,3430 5070,3480 5290,3480 5425,3345 5425,3000 v1(5487.5,2937.5)
CLIB: U14.44 U21.1 | length 4579.8
  TopLayer (1 oz) w5: v1(2080,5150) U21.1@2080,5210 ; v1(4800,3530) 4820,3510 4820,3445 4890,3375 4890,3085 4960,3015 4960,2980 4977.5,2962.5 U14.44@5054.96,2962.5
  BottomLayer (1 oz) w5: v1(2080,5150) 2055,5125 2055,5040 2285,4810 4000,4810 4490,4320 4490,3790 4750,3530 v1(4800,3530)
CLIC: U14.1 U22.1 | length 3055.8
  TopLayer (1 oz) w5: U22.1@3670,790 v1(3670,850) ; v1(5295,2825) 5332.5,2862.5 U14.1@5425.04,2862.5
  BottomLayer (1 oz) w5: v1(3670,850) 3695,875 3830,875 3895,940 3895,1040 4310,1455 4310,2000 5055,2745 5265,2745 5295,2775 v1(5295,2825)
CLID: U14.47 U23.1 | length 5549.4
  TopLayer (1 oz) w5: U23.1@790,800 v1(850,800) ; v1(4935,2705) 4935,2820 5002.5,2887.5 U14.47@5054.96,2887.5
  BottomLayer (1 oz) w5: v1(850,800) 875,825 1020,825 1100,905 1860,905 2190,1235 2810,1235 2850,1195 3970,1195 4260,1485 4260,2030 v1(4935,2705)
CLKOUT: U2.T3 U3.B6 U7.100 | length 4652.1
  TopLayer (1 oz) w5: U2.T3@5385.9,4464.1 v1(5405.59,4444.41) ; U3.B6@5425.27,1637.8 5444.96,1657.48 5482.48,1657.48 5525,1700 5525,1860 5935,2270 6436.22,2270 6783.11,2616.89 6783.11,2726.89 v1(6760,2750)
  BottomLayer (1 oz) w5: v1(5405.59,4444.41) 5425.28,4424.72 5425.28,4354.72 5580,4200 5660,4200 6100,3760 6650,3760 6705,3705 6705,3475 6735,3445 6735,2775 v1(6760,2750)
CTL0: U2.M2 U3.G3 U7.54 | length 4153.3
  TopLayer (1 oz) w5: U3.G3@5228.43,1755.9 v1(5248.11,1775.59) ; U2.M2@5228.43,4424.73 5248.11,4405.04 5248.11,4318.11 5240,4310 5240,4160 5290,4110 5615,4110 6165,3560 6165,3415 6175.71,3404.29 U7.54@6213.03,3404.29 6255.71,3404.29 6340,3320 v1(6340,2995)
  BottomLayer (1 oz) w5: v1(5248.11,1775.59) 5248.11,1871.89 5230,1890 5230,2070 5310,2150 5650,2150 5870,2370 6050,2370 6340,2660 v1(6340,2995)
CTL1: U2.M1 U3.G4 U7.55 | length 4076.7
  TopLayer (1 oz) w5: U3.G4@5228.43,1716.53 v1(5248.11,1736.22) ; U2.M1@5228.43,4385.35 5228.43,4351.57 5235,4345 5235,4335 5230,4330 5230,4155 5285,4100 5610,4100 6145,3565 6145,3405 6171.3,3378.7 U7.55@6213.03,3378.7 6256.3,3378.7 6315,3320 v1(6315,3020)
  BottomLayer (1 oz) w5: v1(5248.11,1736.22) 5228.43,1755.91 5228.43,1876.57 5220,1885 5220,2075 5305,2160 5645,2160 5865,2380 5935,2380 6315,2760 v1(6315,3020)
CTL2: U2.L2 U3.H3 U7.56 | length 4032.1
  TopLayer (1 oz) w5: U3.H3@5189.06,1755.9 v1(5208.74,1775.59) ; U2.L2@5189.06,4424.73 5208.74,4405.04 5208.74,4306.26 5220,4295 5220,4150 5480,3890 5765,3890 5945,3710 5945,3485 6076.89,3353.11 U7.56@6213.03,3353.11 6256.89,3353.11 6290,3320 v1(6290,3045)
  BottomLayer (1 oz) w5: v1(5208.74,1775.59) 5208.74,1861.26 5205,1865 5205,1900 5210,1905 5210,2080 5300,2170 5600,2170 6290,2860 v1(6290,3045)
DATA0: U1.D12 U14.36 | length 3419.7
  TopLayer (1 oz) w5: U1.D12@1910,3075 v1(1960,3075) ; v1(4992.5,3162.5) U14.36@5054.96,3162.5
  BottomLayer (1 oz) w5: v1(1960,3075) 2610,3075 2615,3080 2750,3080 2805,3135 2805,3185 2820,3200 2970,3200 3040,3270 3575,3270 3635,3210 4125,3210 4270,3355 4655,3355 4730,3280 4875,3280 v1(4992.5,3162.5)
DATA1: U1.C12 U14.12 | length 3847.7
  TopLayer (1 oz) w5: U1.C12@1860,3075 v1(1885,3050) ; v1(5337.5,3137.5) U14.12@5425.04,3137.5
  BottomLayer (1 oz) w5: v1(1885,3050) 1955,2980 2785,2980 2810,2955 2870,2955 2965,2860 3235,2860 3330,2765 3825,2765 4070,3010 4340,3010 4395,3065 4975,3065 5047.5,3137.5 v1(5337.5,3137.5)
DATA2: U1.D11 U14.37 | length 3413.2
  TopLayer (1 oz) w5: U1.D11@1910,3025 v1(1935,3050) ; v1(4967.5,3137.5) U14.37@5054.96,3137.5
  BottomLayer (1 oz) w5: v1(1935,3050) 2635,3050 2655,3070 2765,3070 2815,3120 2845,3120 2870,3145 2950,3145 3055,3250 3560,3250 3620,3190 4140,3190 4295,3345 4635,3345 4725,3255 4850,3255 v1(4967.5,3137.5)
DATA3: U1.C11 U14.11 | length 3874.7
  TopLayer (1 oz) w5: U1.C11@1860,3025 v1(1885,3000) ; v1(5362.5,3112.5) U14.11@5425.04,3112.5
  BottomLayer (1 oz) w5: v1(1885,3000) 1920,2965 2740,2965 2865,2840 2930,2840 3075,2695 3575,2695 3595,2715 3935,2715 4165,2945 4340,2945 4450,3055 4980,3055 5037.5,3112.5 v1(5362.5,3112.5)
DATA4: U1.D10 U14.38 | length 3303.4
  TopLayer (1 oz) w5: U1.D10@1910,2975 v1(1960,3025) ; v1(4992.5,3112.5) U14.38@5054.96,3112.5
  BottomLayer (1 oz) w5: v1(1960,3025) 1970,3035 2670,3035 2675,3030 2750,3030 2820,3100 2860,3100 2885,3125 2965,3125 3070,3230 3545,3230 3610,3165 4890,3165 4942.5,3112.5 v1(4992.5,3112.5)
DATA5: U1.C10 U14.10 | length 3856
  TopLayer (1 oz) w5: U1.C10@1860,2975 v1(1885,2950) ; v1(5337.5,3087.5) U14.10@5425.04,3087.5
  BottomLayer (1 oz) w5: v1(1885,2950) 2740,2950 3010,2680 3580,2680 3600,2700 4000,2700 4185,2885 4340,2885 4500,3045 4985,3045 5027.5,3087.5 v1(5337.5,3087.5)
DATA6: U1.D9 U14.39 | length 3255.8
  TopLayer (1 oz) w5: U1.D9@1910,2925 v1(1985,3000) ; v1(4967.5,3087.5) U14.39@5054.96,3087.5
  BottomLayer (1 oz) w5: v1(1985,3000) 2005,3020 2770,3020 2780,3030 2950,3030 2970,3050 2980,3050 3025,3095 3965,3095 4010,3140 4865,3140 4917.5,3087.5 v1(4967.5,3087.5)
DATA7: U1.C9 U14.9 | length 3866.4
  TopLayer (1 oz) w5: U1.C9@1860,2925 v1(1885,2900) ; v1(5362.5,3062.5) U14.9@5425.04,3062.5
  BottomLayer (1 oz) w5: v1(1885,2900) 1920,2935 2685,2935 2955,2665 3585,2665 3605,2685 4065,2685 4205,2825 4340,2825 4550,3035 4990,3035 5017.5,3062.5 v1(5362.5,3062.5)
DMINUS: J20.2 U7.18 | length 751.6
  TopLayer (1 oz) w13.59: U7.18@6866.97,3173.98 7411.49,3173.98 ccw(c7411.49,3235.51) 7455,3192 ccw(c7428.44,3218.56) 7466,3218.56 7466,3244.13 ccw(c7420.44,3244.13) 7452.68,3276.32 ; J20.2@7410,3310 7437,3310 cw(c7437,3300) 7447,3300 7447,3290 ccw(c7466.31,3290) 7452.66,3276.34
DPLUS: J20.3 U7.17 | length 753.8
  TopLayer (1 oz) w13.59: U7.17@6866.97,3148.39 7415,3148.39 ccw(c7415,3228.99) 7471.99,3171.99 ccw(c7431.56,3212.42) 7488.74,3212.42 J20.3@7488.74,3310
F1ASDI: JP6.9 U2.K6 U4.5 U7.57 | length 2631.8
  TopLayer (1 oz) w5: U2.K6@5149.69,4582.2 v1(5169.37,4562.52) ; v1(5390,3810) 5450,3870 5730,3870 U4.5@5770,3830 ; U4.5@5770,3800 5770,3740 5910,3600 5910,3505 6087.48,3327.52 U7.57@6213.03,3327.52
  BottomLayer (1 oz) w5: JP6.9@4820.06,3740.31 4889.74,3810 5085,3810 5155,3880 ; v1(5169.37,4562.52) 5125,4518.15 5125,4390 5025,4290 5025,4030 5155,3900 5155,3880 ; v1(5390,3810) 5225,3810 5155,3880
F1CONFIG_DONE: JP6.3 R3.1 U2.K17 U7.63 | length 2937.3
  TopLayer (1 oz) w5: U2.K17@5149.69,5015.27 5130,4995.59 5130,4375 5080,4325 5010,4325 4965,4280 4965,4190 5005,4150 5040,4150 R3.1@5280,3910 5240,3870 5240,3860.26 JP6.3@5120.06,3740.31 5170.37,3690 5270,3690 v1(5320,3640) ; v1(5845,3480) 6151.02,3173.98 U7.63@6213.03,3173.98
  BottomLayer (1 oz) w5: v1(5320,3640) 5410,3550 5775,3550 v1(5845,3480)
F1DATA0: JP6.7 U2.H7 U4.2 U7.60 | length 2644.9
  TopLayer (1 oz) w5: U2.H7@5070.94,4621.57 5051.26,4601.89 5051.26,4575 5039.45,4563.19 5023.7,4563.19 5011.89,4551.38 5011.89,4371.89 4935,4295 4935,3990 4900,3955 4900,3865 4920.06,3844.94 JP6.7@4920.06,3740.31 4870,3690.26 4870,3590 4890,3570 5550,3570 5595,3525 5645,3525 5670,3550 5695,3525 5860,3525 6134.25,3250.75 U7.60@6213.03,3250.75
F1DCLK: JP6.1 U2.L1 U4.6 U7.59 | length 2177.4
  TopLayer (1 oz) w5: U2.L1@5189.06,4385.35 5189.06,4300.94 5210,4280 5210,4145 5400,3955 5400,3865 5330,3795 5274.74,3795 JP6.1@5220.06,3740.31 5365.31,3740.31 5480,3855 5695,3855 U4.6@5720,3830 ; U4.6@5720,3800 5720,3740 5875,3585 5875,3525 6123.66,3276.34 U7.59@6213.03,3276.34
F1NCE: JP6.6 R6.1 U2.J7 U7.61 | length 3016.8
  TopLayer (1 oz) w5: v1(5090.63,4601.89) U2.J7@5110.31,4621.57 ; v1(5095,3910) R6.1@5130,3910 ; v1(5110.37,3550) 5545,3550 5590,3505 5855,3505 6134.84,3225.16 U7.61@6213.03,3225.16
  BottomLayer (1 oz) w5: v1(5090.63,4601.89) 5110.31,4582.2 5110.31,4425.31 5015,4330 5015,3990 v1(5095,3910) 5015,3830 4835,3830 4770,3765 4770,3615 4795,3590 4969.74,3590 JP6.6@5020.06,3640.31 v1(5110.37,3550)
F1NCONFIG: JP6.5 R5.1 U2.J2 U7.62 | length 2399.3
  TopLayer (1 oz) w5: JP6.5@5020,3740.37 R5.1@5020,3910 4945,3985 4945,4290 5000,4345 5060,4345 5090.63,4375.63 5090.63,4405.04 U2.J2@5110.31,4424.73 ; U7.62@6213.03,3199.57 v1(6259.57,3199.57)
  BottomLayer (1 oz) w5: 5069.74,3790 JP6.5@5020.06,3740.31 5070.37,3690 5365,3690 5485,3570 5830,3570 6125,3275 6184.13,3275 v1(6259.57,3199.57)
F1NCS: JP6.8 U2.J1 U4.1 U7.58 | length 2508.1
  TopLayer (1 oz) w5: U2.J1@5110.31,4385.35 5110.31,4370.31 5075,4335 5005,4335 4955,4285 4955,4065 5070,3950 5070,3720 5040,3690 4969.74,3690 JP6.8@4920.06,3640.31 4970.37,3590 U4.1@5620,3590 ; U4.1@5620,3580 U4.1@5620,3590 ; v1(5620,3635) U4.1@5620,3590 ; v1(6143.07,3301.93) U7.58@6213.03,3301.93
  BottomLayer (1 oz) w5: v1(5620,3635) 5665,3590 5855,3590 v1(6143.07,3301.93)
F1NSTATUS_04: R4.1 U2.L12 | length 759.3
  TopLayer (1 oz) w5: U2.L12@5188.63,4818.26 5188.92,4818.56 v1(5208.74,4838.37) ; v1(5240,5485) R4.1@5240,5520
  BottomLayer (1 oz) w5: v1(5208.74,4838.37) 5189.06,4858.06 5189.06,5090.94 5165,5115 5165,5410 v1(5240,5485)
F2ASDI: JP8.9 U3.K6 U5.5 U7.67 | length 2400.8
  TopLayer (1 oz) w5: v1(5090.63,1657.48) U3.K6@5110.31,1637.8 ; U5.5@5670,2690 v1(5725,2690) ; U7.67@6213.03,3071.61 v1(6261.61,3071.61)
  MidLayer1 (0.5 oz) w5: v1(5090.63,1657.48) 5110.31,1677.16 5189.06,1677.16 5228.43,1716.54 5228.43,2228.43 5409.94,2409.94 JP8.9@5409.94,2489.69
  BottomLayer (1 oz) w5: JP8.9@5409.94,2489.69 5479.63,2420 5640,2420 5700,2480 5700,2665 v1(5725,2690) 5770,2690 6151.61,3071.61 v1(6261.61,3071.61)
F2CONFIG_DONE: JP8.3 R9.1 U3.K17 U7.73 | length 3052.2
  TopLayer (1 oz) w5: R9.1@5109.94,2320.06 JP8.3@5109.94,2489.69 ; U3.K17@5110.31,1204.73 5130,1224.41 5130,1845 5100,1875 5070,1875 5050,1895 5050,2080 5070,2100 5070,2270 R9.1@5120,2320 ; v1(5650,2465) 5660,2475 5940,2475 5975,2510 5975,2845 6048.07,2918.07 U7.73@6213.03,2918.07
  BottomLayer (1 oz) w5: JP8.3@5109.94,2489.69 5160,2539.74 5160,2610 5210,2660 5455,2660 v1(5650,2465)
F2DATA0: JP8.7 U3.H7 U5.2 U7.70 | length 2364.8
  TopLayer (1 oz) w5: U3.H7@5189.06,1598.43 v1(5208.74,1618.11) ; JP8.7@5309.94,2489.69 5360.26,2540 5560,2540 5595,2505 5925,2505 5945,2525 5945,2565 5920,2590 5945,2615 5945,2860 6079.84,2994.84 U7.70@6213.03,2994.84
  BottomLayer (1 oz) w5: v1(5208.74,1618.11) 5189.06,1637.8 5189.06,1845.94 5130,1905 5130,2130 5309.94,2309.94 JP8.7@5309.94,2489.69
F2DCLK: JP8.1 U3.L1 U5.6 U7.69 | length 2178
  TopLayer (1 oz) w5: U3.L1@5070.94,1834.65 5070.94,1859.06 5040,1890 5040,2085 5050,2095 5050,2449.63 JP8.1@5009.94,2489.69 5060,2539.74 5060,2610 5110,2660 5500,2660 5520,2640 U5.6@5670,2640 5725,2640 5935,2850 5935,2865 6075,3005 6140,3005 6155.43,3020.43 U7.69@6213.03,3020.43
F2NCE: JP8.6 R12.1 U3.J7 U7.71 | length 2600.1
  TopLayer (1 oz) w5: U3.J7@5149.69,1598.43 v1(5169.37,1618.11) ; v1(5575,2495) 5930,2495 5955,2520 5955,2855 6069.25,2969.25 U7.71@6213.03,2969.25
  BottomLayer (1 oz) w5: v1(5169.37,1618.11) 5149.69,1637.8 5149.69,1870.31 5120,1900 5120,2170 v1(5290,2340) 5290,2409.63 5260,2439.63 5260,2539.63 JP8.6@5209.94,2589.69 5260.26,2640 5430,2640 v1(5575,2495)
F2NCONFIG: JP8.5 R11.1 U3.J2 U7.72 | length 2506.6
  TopLayer (1 oz) w5: U3.J2@5149.69,1795.27 5169.37,1814.96 5169.37,1850.63 5125,1895 5080,1895 5070,1905 5070,2070 5160,2160 5280,2160 5330,2210 5330,2280 R11.1@5370,2320 5320,2370 5240,2370 5209.94,2400.06 JP8.5@5209.94,2489.69 5260,2439.63 5554.63,2439.63 5600,2485 5935,2485 5965,2515 5965,2850 6058.66,2943.66 U7.72@6213.03,2943.66
F2NCS: JP8.8 U3.J1 U5.1 U7.68 | length 2357.8
  TopLayer (1 oz) w5: U3.J1@5149.69,1834.65 5149.69,1855.31 5120,1885 5075,1885 5060,1900 5060,2075 5209.94,2224.94 5209.94,2335.06 5160,2385 5160,2510 5190,2540 5260.26,2540 JP8.8@5309.94,2589.69 5360.26,2640 5490,2640 5615,2515 5810,2515 v1(5835,2540) U5.1@5890,2540 ; v1(6166.02,3046.02) U7.68@6213.03,3046.02
  BottomLayer (1 oz) w5: v1(5835,2540) 5855,2560 5855,2735 v1(6166.02,3046.02)
F2NSTATUS_05: R10.1 U3.L12 | length 625.8
  TopLayer (1 oz) w5: R10.1@4680,1030 v1(4680,1065) ; v1(5051.26,1381.89) U3.L12@5070.94,1401.57
  BottomLayer (1 oz) w5: v1(4680,1065) 4680,1168.11 4795.35,1283.46 4952.83,1283.46 v1(5051.26,1381.89)
FCLKA+: JP11.8 U2.K4 | length 2455.7
  TopLayer (1 oz) w12: U2.K4@5149.69,4503.47 v1(5169.37,4483.78)
  MidLayer1 (0.5 oz) w5: JP11.8@3210,3590 3260,3640 3330,3640 3360,3670 3360,3810 3520,3970 4051.53,3970 4585,4503.47 5149.69,4503.47 v1(5169.37,4483.78)
FCLKA-: JP11.12 U2.K5 | length 2456.1
  TopLayer (1 oz) w12: U2.K5@5149.69,4542.84 v1(5169.37,4523.15)
  MidLayer1 (0.5 oz) w5: JP11.12@3210,3690 3260,3740 3260,3815 3435,3990 4031.53,3990 4225.49,4183.95 4225.49,4253.95 4541.53,4570 4565,4570 4592.16,4542.84 5149.69,4542.84 v1(5169.37,4523.15)
FCLKB+: JP13.8 U2.K16 | length 3825.8
  TopLayer (1 oz) w12: U2.K16@5149.69,4975.9 v1(5169.37,4995.59)
  MidLayer1 (0.5 oz) w5: JP13.8@1920,4160 1870,4210 1870,4385 1895,4410 1955,4410 2070,4525 2985,4525 3250,4790 3940,4790 4030,4880 4552.83,4880 4609.37,4936.54 5110.31,4936.54 v1(5169.37,4995.59)
FCLKB-: JP13.12 U2.K15 | length 3824.9
  TopLayer (1 oz) w12: U2.K15@5149.69,4936.53 v1(5169.37,4956.22)
  MidLayer1 (0.5 oz) w5: JP13.12@1920,4260 1970,4310 1970,4385 2090,4505 3005,4505 3270,4770 3842.83,4770 4102.83,4510 4242.83,4510 4630,4897.17 5110.31,4897.17 v1(5169.37,4956.22)
FCLKC+: JP12.8 U3.K16 | length 3629
  TopLayer (1 oz) w12: v1(5090.63,1224.41) U3.K16@5110.31,1244.1
  MidLayer4 (0.5 oz) w5: JP12.8@1950,1880 1900,1830 1900,1755 1925,1730 2000,1730 2055,1675 3145,1675 3650,1170 4065,1170 4099.72,1204.72 5070.94,1204.72 v1(5090.63,1224.41)
FCLKC-: JP12.12 U3.K15 | length 3628.8
  TopLayer (1 oz) w12: v1(5090.63,1263.78) U3.K15@5110.31,1283.47
  MidLayer4 (0.5 oz) w5: JP12.12@1950,1980 2000,1930 2000,1755 2025,1730 3130,1730 3670,1190 4045,1190 4095,1240 4730,1240 4734.09,1244.09 5070.94,1244.09 v1(5090.63,1263.78)
FCLKD+: JP10.8 U3.K4 | length 2353.8
  TopLayer (1 oz) w12: v1(5090.63,1736.22) U3.K4@5110.31,1716.53
  MidLayer4 (0.5 oz) w5: JP10.8@3210,2290 3261,2239 3261,2169 3415,2015 3970,2015 4460,1525 4518.46,1525 4710,1716.54 5070.95,1716.54 v1(5090.63,1736.22)
FCLKD-: JP10.12 U3.K5 | length 2355.9
  TopLayer (1 oz) w12: v1(5090.63,1696.85) U3.K5@5110.31,1677.16
  MidLayer4 (0.5 oz) w5: JP10.12@3210,2390 3260,2340 3337,2340 3361,2316 3361,2139 3435,2065 3985,2065 4260,1790 4695,1790 4729.09,1755.91 5100.47,1755.91 5110.31,1746.06 5110.31,1716.54 v1(5090.63,1696.85)
FD0: U2.V6 U3.B3 U7.34 | length 4505.4
  TopLayer (1 oz) w5: U3.B3@5425.27,1755.9 v1(5444.96,1775.59) ; U2.V6@5464.65,4582.2 5482.8,4582.2 5535,4530 5535,4310 6055,3790 6665,3790 6720,3735 6720,3615 6706.34,3601.34 U7.34@6706.34,3555.08 6706.34,2836.34 v1(6605,2735)
  BottomLayer (1 oz) w5: v1(5444.96,1775.59) 5464.65,1795.28 5464.65,1864.65 5485,1885 5505,1885 5910,2290 6325,2290 6520,2485 6520,2650 v1(6605,2735)
FD1: U2.U6 U3.C3 U7.35 | length 4552.7
  TopLayer (1 oz) w5: U3.C3@5385.9,1755.9 v1(5405.59,1775.59) ; U2.U6@5425.27,4582.2 5444.96,4562.52 5477.48,4562.52 5525,4515 5525,4305 6050,3780 6660,3780 6710,3730 6710,3630 6680.75,3600.75 U7.35@6680.75,3555.08 6680.75,2845.75 v1(6605,2770)
  BottomLayer (1 oz) w5: v1(5405.59,1775.59) 5425.28,1795.28 5425.28,1865.28 5455,1895 5500,1895 5905,2300 6320,2300 6510,2490 6510,2675 v1(6605,2770)
FD2: U2.V4 U3.C2 U7.36 | length 4431.8
  TopLayer (1 oz) w5: U3.C2@5385.9,1795.27 v1(5405.59,1814.96) ; U2.V4@5464.65,4503.47 5481.53,4503.47 5515,4470 5515,4300 6045,3770 6655,3770 6700,3725 6700,3645 6655.16,3600.16 U7.36@6655.16,3555.08 6655.16,2855.16 v1(6605,2805)
  BottomLayer (1 oz) w5: v1(5405.59,1814.96) 5385.91,1834.65 5385.91,1865.91 5425,1905 5495,1905 5900,2310 6315,2310 6500,2495 6500,2700 v1(6605,2805)
FD3: U2.U4 U3.D3 U7.37 | length 4437.6
  TopLayer (1 oz) w5: U3.D3@5346.53,1755.9 v1(5366.22,1775.59) ; U2.U4@5425.27,4503.47 5444.96,4483.78 5476.22,4483.78 5505,4455 5505,4295 6040,3760 6420,3760 6555,3625 6615,3625 6629.57,3610.43 U7.37@6629.57,3555.08 6629.57,2864.57 v1(6605,2840)
  BottomLayer (1 oz) w5: v1(5366.22,1775.59) 5366.22,1876.22 5400,1910 5400,2065 5435,2100 5675,2100 5895,2320 6310,2320 6490,2500 6490,2725 v1(6605,2840)
FD4: U2.R2 U3.E3 U7.44 | length 4281.3
  TopLayer (1 oz) w5: U3.E3@5307.16,1755.9 v1(5326.85,1775.59) ; U2.R2@5346.53,4424.73 5366.22,4405.04 5366.22,4368.78 5400,4335 5400,4155 5405,4150 5635,4150 6035,3750 6415,3750 6450.43,3714.57 U7.44@6450.43,3555.08 v1(6450.43,3505.43)
  BottomLayer (1 oz) w5: v1(5326.85,1775.59) 5346.54,1795.28 5346.54,1876.54 5390,1920 5390,2070 5430,2110 5670,2110 5890,2330 6070,2330 6545,2805 6545,3320 6450.43,3414.57 v1(6450.43,3505.43)
FD5: U2.R1 U3.E2 U7.45 | length 4272.1
  TopLayer (1 oz) w5: U3.E2@5307.16,1795.27 v1(5326.85,1814.96) ; U2.R1@5346.53,4385.35 5346.53,4363.47 5390,4320 5390,4150 5400,4140 5630,4140 6030,3740 6410,3740 6424.84,3725.16 v1(6424.84,3604.84) U7.45@6424.84,3555.08
  BottomLayer (1 oz) w5: v1(5326.85,1814.96) 5307.17,1834.65 5307.17,1877.17 5320,1890 5340,1890 5380,1930 5380,2075 5425,2120 5665,2120 5885,2340 6065,2340 6535,2810 6535,3315 6424.84,3425.16 v1(6424.84,3604.84)
FD6: U2.N2 U3.F3 U7.46 | length 4351.9
  TopLayer (1 oz) w5: U3.F3@5267.8,1755.9 v1(5287.48,1775.59) ; U2.N2@5267.8,4424.73 5287.48,4405.04 5287.48,4367.52 5320,4335 5350,4335 5380,4305 5380,4145 5395,4130 5625,4130 6025,3730 6405,3730 6410,3725 6410,3635 6399.25,3624.25 U7.46@6399.25,3555.08 v1(6399.25,3505.75)
  BottomLayer (1 oz) w5: v1(5287.48,1775.59) 5287.48,1877.48 5315,1905 5335,1905 5370,1940 5370,2080 5420,2130 5660,2130 5880,2350 6060,2350 6525,2815 6525,3310 6399.25,3435.75 v1(6399.25,3505.75)
FD7: U2.N1 U3.F4 U7.47 | length 4385.9
  TopLayer (1 oz) w5: U3.F4@5267.8,1716.53 v1(5287.48,1736.22) ; U2.N1@5267.8,4385.35 5267.8,4362.2 5315,4315 5345,4315 5370,4290 5370,4140 5390,4120 5620,4120 6115,3625 6352.32,3625 v1(6373.66,3603.66) U7.47@6373.66,3555.08
  BottomLayer (1 oz) w5: v1(5287.48,1736.22) 5267.8,1755.91 5267.8,1867.2 5240,1895 5240,2065 5315,2140 5655,2140 5875,2360 6055,2360 6515,2820 6515,3305 6373.66,3446.34 v1(6373.66,3603.66)
FD8: U2.M4 U3.G1 U7.80 | length 4287.7
  TopLayer (1 oz) w5: U3.G1@5228.43,1834.65 5228.43,1858.43 5300,1930 5300,2075 5355,2130 5675,2130 5895,2350 6075,2350 6213.03,2488.03 U7.80@6213.03,2738.94 6268.94,2738.94 6415,2885 v1(6415,3215) ; U2.M4@5228.43,4503.47 v1(5248.11,4483.78)
  BottomLayer (1 oz) w5: v1(5248.11,4483.78) 5228.43,4464.09 5228.43,4363.43 5160,4295 5160,4175 5215,4120 5620,4120 6185,3555 6185,3445 v1(6415,3215)
FD9: U2.M3 U3.G2 U7.81 | length 4147
  TopLayer (1 oz) w5: U3.G2@5228.43,1795.27 5248.11,1814.96 5248.11,1858.11 5310,1920 5310,2070 5360,2120 5680,2120 5900,2340 6080,2340 6296.89,2556.89 U7.81@6296.89,2664.92 6296.89,2736.89 6440,2880 v1(6440,3240) ; U2.M3@5228.43,4464.1 v1(5248.11,4444.41)
  BottomLayer (1 oz) w5: v1(5248.11,4444.41) 5248.11,4326.89 5290,4285 5290,4155 5315,4130 5625,4130 6205,3550 6205,3520 6300,3425 6300,3380 v1(6440,3240)
FD10: U2.N4 U3.F1 U7.82 | length 4151.4
  TopLayer (1 oz) w5: U3.F1@5267.8,1834.65 5267.8,1857.8 5320,1910 5320,2065 5365,2110 5685.86,2110 5905.86,2330 6085,2330 6310,2555 6310,2600 6322.48,2612.48 U7.82@6322.48,2664.92 6322.48,2732.48 6465,2875 v1(6465,3265) ; U2.N4@5267.8,4503.47 v1(5287.48,4483.78)
  BottomLayer (1 oz) w5: v1(5287.48,4483.78) 5267.8,4464.09 5267.8,4337.2 5300,4305 5300,4160 5320,4140 5630,4140 6220,3550 6220,3525 6325,3420 6325,3405 v1(6465,3265)
FD11: U2.N3 U3.F2 U7.83 | length 4070.9
  TopLayer (1 oz) w5: U3.F2@5267.8,1795.27 5287.48,1814.96 5287.48,1857.48 5335,1905 5495,1905 5910,2320 6090,2320 6325,2555 6325,2585 6348.07,2608.07 U7.83@6348.07,2664.92 6348.07,2728.07 6490,2870 v1(6490,3290) ; U2.N3@5267.8,4464.1 v1(5287.48,4444.41)
  BottomLayer (1 oz) w5: v1(5287.48,4444.41) 5287.48,4342.52 5310,4320 5310,4165 5325,4150 5635,4150 6235,3550 6235,3530 6300,3465 6315,3465 v1(6490,3290)
FD12: U2.P2 U3.D1 U7.95 | length 4403.9
  TopLayer (1 oz) w5: U2.P2@5307.16,4424.73 v1(5326.85,4405.04) ; U3.D1@5346.53,1834.65 5346.53,1856.53 5385,1895 5500,1895 5915,2310 6360,2310 6655.16,2605.16 U7.95@6655.16,2664.92 v1(6655.16,2715.16)
  BottomLayer (1 oz) w5: v1(5326.85,4405.04) 5307.17,4385.35 5307.17,4347.83 5320,4335 5320,4170 5330,4160 5640,4160 6080,3720 6400,3720 6500,3620 6500,3500 6655.16,3344.84 v1(6655.16,2715.16)
FD13: U2.P3 U3.D2 U7.96 | length 4361.6
  TopLayer (1 oz) w5: U2.P3@5307.16,4464.1 v1(5326.85,4444.41) ; U3.D2@5346.53,1795.27 5366.22,1814.96 5366.22,1846.22 5405,1885 5505,1885 5920,2300 6365,2300 6680.75,2615.75 v1(6680.75,2740.75)
  BottomLayer (1 oz) w5: v1(5326.85,4444.41) 5346.54,4424.72 5346.54,4358.46 5385,4320 5415,4320 5565,4170 5645,4170 6085,3730 6405,3730 6555,3580 6555,3495 6680.75,3369.25 v1(6680.75,2740.75)
FD14: U2.R3 U3.B4 U7.97 | length 4387
  TopLayer (1 oz) w5: U2.R3@5346.53,4464.1 v1(5366.22,4444.41) ; U3.B4@5425.27,1716.53 5444.96,1736.22 5481.22,1736.22 5505,1760 5505,1870 5925,2290 6390,2290 6706.34,2606.34 U7.97@6706.34,2664.92 v1(6706.34,2713.66)
  BottomLayer (1 oz) w5: v1(5366.22,4444.41) 5366.22,4353.78 5390,4330 5420,4330 5570,4180 5650,4180 6090,3740 6410,3740 6706.34,3443.66 v1(6706.34,2713.66)